# Altium PCB NIXIEClock_151223.PcbDoc (part 2 of 3)
Units mil, origin at the board's own origin, x right, y up, seen from the top; angles counter-clockwise.
Board outline 8470 x 2600 mil, 2 copper layers (Top Layer, Bottom Layer); 115 components, 157 nets, 483 pads, 249 vias.
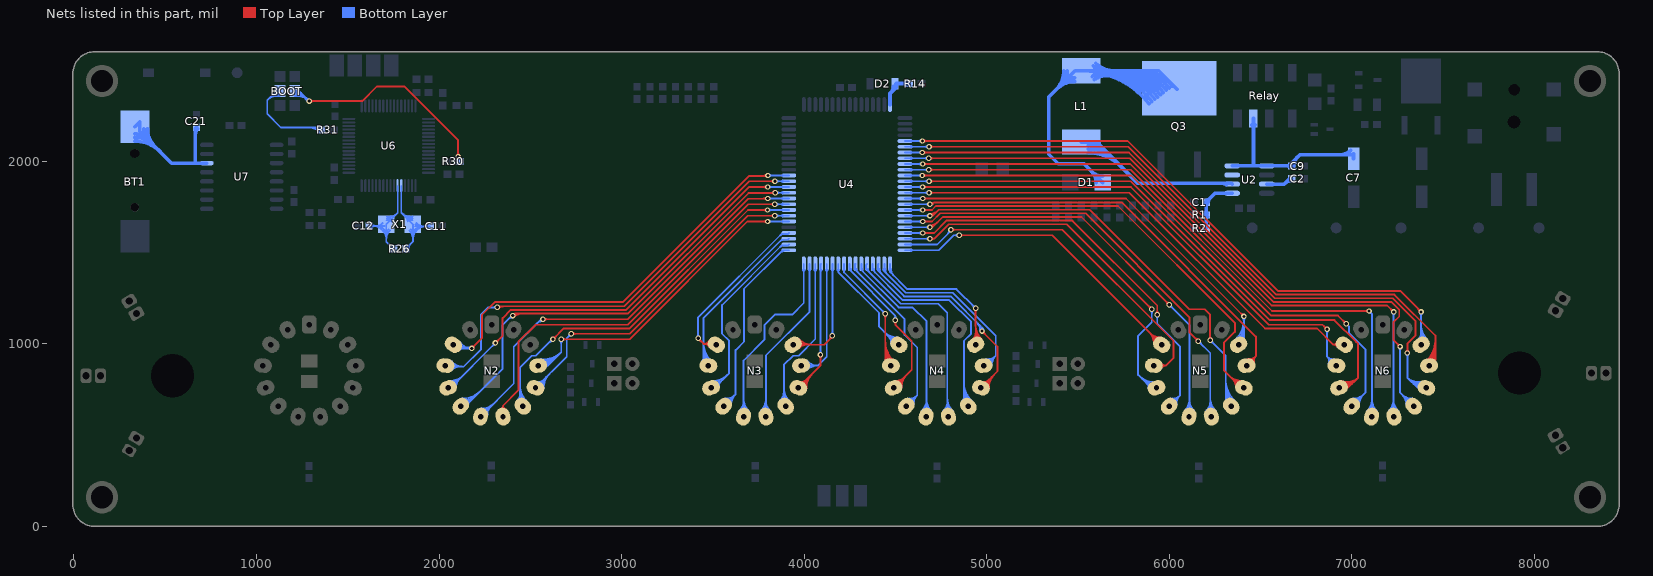
[diagram p2: the nets of this part, all layers, seen from the top]

## Via types
v1: diameter 30, hole 18, Top Layer to Bottom Layer, tented both sides, 204 vias
v2: diameter 40, hole 23, Top Layer to Bottom Layer, tented both sides, 35 vias
v3: diameter 30, hole 15, Top Layer to Bottom Layer, tented both sides, 10 vias

## Nets (pads, with @x,y where several pads share a name; then routed paths per layer and width w, separated by ;. In a path a pad name is that pad's centre, name@x,y a point inside that pad or via, vN(x,y) a via of type N, cw(c..) or ccw(c..) an arc to the next point about the centre after c; other vN are vias at no path point) (continued)
N2_1: N2.3 U4.14 | length 2739.5
  Top Layer w10: v1(2179,975) 2234.63,1030.63 2234.63,1158.06 2306.57,1230 3009,1230 3699,1920 3799,1920 v3(3801.24,1922.24) ; v1@2179,985 ccw(c2179,1009.14) 2196.07,992.07 ccw(c2213.14,975) v1@2189,975 ; 3771.68,1920 ccw(c3771.68,1951.8) v3@3794.17,1929.32 ; 3782.52,1920 cw(c3782.52,1903.52) v3@3794.17,1915.17
  Bottom Layer w10: N2.3@2078.4,995.37 2098.77,975 v1(2179,975) cw(c2179,1052.24) N2.3@2114.98,1009.02 ; N2.3@2098.4,997.82 ccw(c2141.36,1026.83) 2141.36,975 ; N2.3@2106.69,1003.42 ccw(c2160.18,1039.54) 2160.18,975 ; N2.3@2110.8,965.48 cw(c2133.79,942.49) 2133.79,975 ; v1@2170.34,970 ccw(c2149.44,957.93) 2155.68,981.25 ccw(c2161.93,1004.57) v1@2174,983.66 ; v1@2171.93,967.93 ccw(c2154.86,950.86) 2154.86,975 ccw(c2154.86,999.14) v1@2171.93,982.07 ; v3(3801.24,1922.24) U4.14@3916.09,1922.24 ; v3@3808.32,1915.17 cw(c3825.39,1898.1) 3825.39,1922.24 cw(c3825.39,1946.39) v3@3808.32,1929.32 ; U4.14@3882.44,1918.12 ccw(c3872.49,1908.18) 3872.49,1922.24 ccw(c3872.49,1936.31) U4.14@3882.44,1926.36
N2_2: N2.4 U4.13 | length 2835.5
  Top Layer w10: v1(2319,1200) 2324.71,1205.71 3014.71,1205.71 3699.75,1890.75 v1(3839.75,1890.75) ; v1@2326.07,1192.93 cw(c2356.93,1162.07) 2356.93,1205.71 ; v1@3832.68,1883.68 ccw(c3815.61,1866.61) 3815.61,1890.75 ccw(c3815.61,1914.89) v1@3832.68,1897.82
  Bottom Layer w10: N2.4@2034.96,880.85 2040.81,875 2134,875 ; N2.4@2055.28,889.42 ccw(c2088.26,919.92) 2088.26,875 ; N2.4@2061.96,862.43 cw(c2092.31,832.09) 2092.31,875 ; N2.4@2062.62,896.21 ccw(c2111.13,941.06) 2111.13,875 ; N2.4@2069.03,855.36 cw(c2116.45,807.95) 2116.45,875 ; N2.4@2069.97,903 ccw(c2134,962.21) 2134,875 ; v1@2311.93,1192.93 ccw(c2294.86,1175.86) 2294.86,1200 ccw(c2294.86,1224.14) v1@2311.93,1207.07 ; v1(2319,1200) 2269,1200 2230.33,1161.33 2230.33,971.33 2134,875 ; v1(3839.75,1890.75) U4.13@3916.09,1890.75 ; v1@3846.82,1883.68 cw(c3863.89,1866.61) 3863.89,1890.75 cw(c3863.89,1914.89) v1@3846.82,1897.82 ; U4.13@3882.44,1886.63 ccw(c3872.49,1876.68) 3872.49,1890.75 ccw(c3872.49,1904.82) U4.13@3882.44,1894.87
N2_3: N2.5 U4.12 | length 2818.3
  Top Layer w10: v1(2309,1005) 2347.67,1043.67 2347.67,1141.09 2392.28,1185.71 3024.71,1185.71 3699,1860 3799,1860 v3(3799.75,1859.25) ; v1@2309,1015 ccw(c2309,1039.14) 2326.07,1022.07 ccw(c2343.14,1005) v1@2319,1005 ; 3773.8,1860 cw(c3773.8,1833.3) v3@3792.68,1852.18 ; 3777.41,1860 ccw(c3777.41,1881.59) v3@3792.68,1866.32
  Bottom Layer w10: N2.5@2049.72,759.26 2063.26,759.26 v1(2309,1005) ; N2.5@2058.93,777.12 ccw(c2058.93,830.7) 2096.81,792.81 ; N2.5@2058.93,787.12 ccw(c2058.93,864.84) 2113.88,809.88 ; N2.5@2058.93,797.12 ccw(c2058.93,898.99) 2130.96,826.96 ; N2.5@2083.3,762.75 cw(c2123.24,762.75) 2094.99,790.99 ; N2.5@2093.3,762.75 cw(c2157.38,762.75) 2112.07,808.07 ; v1@2299,1005 cw(c2274.86,1005) 2291.93,987.93 cw(c2309,970.86) v1@2309,995 ; v3(3799.75,1859.25) U4.12@3916.09,1859.25 ; v3@3806.82,1852.18 cw(c3823.89,1835.11) 3823.89,1859.25 cw(c3823.89,1883.39) v3@3806.82,1866.32 ; U4.12@3882.44,1855.13 ccw(c3872.49,1845.19) 3872.49,1859.25 ccw(c3872.49,1873.32) U4.12@3882.44,1863.37
N2_4: N2.6 U4.11 | length 2997.7
  Top Layer w10: v1@2407.72,1164.28 ccw(c2410.13,1170.29) 2414.71,1165.71 ; v1@2411.07,1147.93 cw(c2454,1105) 2454,1165.71 ; v1@2413.28,1158.72 cw(c2419.29,1161.13) 2414.71,1165.71 ; 2429.86,1165.71 ccw(c2429.86,1129.14) v1(2404,1155) 2414.71,1165.71 ; 3813.49,1826.26 ccw(c3813.49,1855.51) v1@3834.17,1834.83 ; 3820.71,1826.26 cw(c3820.71,1807.23) v1@3834.17,1820.68 ; v1(3841.24,1827.76) 3839.75,1826.26 3695.26,1826.26 3034.71,1165.71 2414.71,1165.71
  Bottom Layer w10: N2.6@2119.3,658.46 2142.46,658.46 2347.67,863.67 2347.67,1103.67 2399,1155 v1(2404,1155) ; N2.6@2125.83,670.19 ccw(c2125.83,738.68) 2174.25,690.25 ; N2.6@2125.83,680.19 ccw(c2125.83,772.82) 2191.32,707.32 ; N2.6@2125.83,690.19 ccw(c2125.83,806.97) 2208.4,724.4 ; N2.6@2125.83,700.19 ccw(c2125.83,841.11) 2225.47,741.47 ; N2.6@2160.2,665.82 cw(c2185.23,665.82) 2167.53,683.53 ; 2378.39,1134.39 cw(c2404,1108.79) v1@2404,1145 ; 2390.46,1146.46 ccw(c2381.93,1155) v1@2394,1155 ; v1(3841.24,1827.76) U4.11@3916.09,1827.76 ; v1@3848.32,1820.68 cw(c3865.39,1803.61) 3865.39,1827.76 cw(c3865.39,1851.9) v1@3848.32,1834.83 ; U4.11@3882.44,1823.64 ccw(c3872.49,1813.69) 3872.49,1827.76 ccw(c3872.49,1841.82) U4.11@3882.44,1831.88
N2_5: N2.7 U4.10 | length 2759.2
  Top Layer w10: v1(2569,1135) 3034,1135 3694,1795 3799,1795 v1(3800.26,1796.26) ; v1@2576.07,1127.93 cw(c2593.14,1110.86) 2593.14,1135 cw(c2593.14,1159.14) v1@2576.07,1142.07 ; 3773.08,1795 ccw(c3773.08,1823.44) v1@3793.19,1803.33 ; 3779.16,1795 cw(c3779.16,1775.16) v1@3793.19,1789.19
  Bottom Layer w10: N2.7@2227.75,601.53 2409,782.78 2409,985.25 2558.75,1135 v1(2569,1135) ccw(c2569,1110.25) 2551.5,1127.75 ; N2.7@2230.11,625.46 ccw(c2230.11,677.54) 2266.93,640.71 ; N2.7@2230.11,635.46 ccw(c2230.11,711.68) 2284,657.78 ; N2.7@2230.11,645.46 ccw(c2230.11,745.82) 2301.07,674.85 ; N2.7@2254.48,611.09 cw(c2295.93,611.09) 2266.62,640.4 ; N2.7@2264.48,611.09 cw(c2330.07,611.09) 2283.69,657.47 ; 2534.43,1110.68 cw(c2569,1076.11) v1@2569,1125 ; v1(3800.26,1796.26) U4.10@3916.09,1796.26 ; v1@3807.33,1789.19 cw(c3824.4,1772.12) 3824.4,1796.26 cw(c3824.4,1820.4) v1@3807.33,1803.33 ; U4.10@3882.44,1792.14 ccw(c3872.49,1782.19) 3872.49,1796.26 ccw(c3872.49,1810.33) U4.10@3882.44,1800.38
N2_6: N2.8 U4.9 | length 2382.8
  Top Layer w10: N2.8@2337.51,643.85 ccw(c2332,661.23) 2350.23,661.23 ; N2.8@2350.23,601.53 2350.23,661.23 ; N2.8@2362.34,642.26 cw(c2371.14,661.23) 2350.23,661.23 ; v1@3832.17,1757.69 ccw(c3815.09,1740.62) 3815.09,1764.76 ccw(c3815.09,1788.91) v1@3832.17,1771.83 ; v1(3839.24,1764.76) 3693.76,1764.76 3034,1105 2528.75,1105 2434.59,1010.84 2434.59,745.59 2350.23,661.23
  Bottom Layer w10: v1(3839.24,1764.76) U4.9@3916.09,1764.76 ; v1@3846.31,1757.69 cw(c3863.38,1740.62) 3863.38,1764.76 cw(c3863.38,1788.91) v1@3846.31,1771.83 ; U4.9@3882.44,1760.64 ccw(c3872.49,1750.7) 3872.49,1764.76 ccw(c3872.49,1778.83) U4.9@3882.44,1768.88
N2_7: N2.9 U4.8 | length 2493.8
  Top Layer w10: v1(2624,1025) 2684,1085 3044,1085 3692.27,1733.27 v3(3799,1733.27) ; v1@2624,1035 ccw(c2624,1059.14) 2641.07,1042.07 ccw(c2658.14,1025) v1@2634,1025 ; v3@3791.93,1726.2 ccw(c3774.86,1709.13) 3774.86,1733.27 ccw(c3774.86,1757.41) v3@3791.93,1740.34
  Bottom Layer w10: N2.9@2427.86,690.12 ccw(c2388.89,729.08) 2444,729.08 ; N2.9@2434.93,683.04 ccw(c2413.03,704.94) 2444,704.94 ; 2444,720.21 ccw(c2506.56,720.21) N2.9@2462.32,675.97 ; 2444,744.35 ccw(c2530.7,744.35) N2.9@2469.39,683.04 ; 2444,768.49 ccw(c2554.84,768.49) N2.9@2476.46,690.12 ; N2.9@2458.69,658.44 2444,673.13 2444,871.43 2507.57,935 2529,935 2619,1025 v1(2624,1025) ; 2598.39,1004.39 cw(c2624,978.79) v1@2624,1015 ; 2610.46,1016.46 ccw(c2601.93,1025) v1@2614,1025 ; v3(3799,1733.27) U4.8@3916.09,1733.27 ; v3@3806.07,1726.2 cw(c3823.14,1709.13) 3823.14,1733.27 cw(c3823.14,1757.41) v3@3806.07,1740.34 ; U4.8@3882.44,1729.15 ccw(c3872.49,1719.2) 3872.49,1733.27 ccw(c3872.49,1747.33) U4.8@3882.44,1737.39
N2_8: N2.10 U4.7 | length 2262.5
  Top Layer w10: v1(2724,1055) 3044,1055 3690.77,1701.77 v1(3839,1701.77) ; v1@2731.07,1047.93 cw(c2748.14,1030.86) 2748.14,1055 cw(c2748.14,1079.14) v1@2731.07,1062.07 ; v1@3831.93,1694.7 ccw(c3814.86,1677.63) 3814.86,1701.77 ccw(c3814.86,1725.91) v1@3831.93,1708.84
  Bottom Layer w10: N2.10@2528.27,759.24 2699,929.97 2699,1030 v1(2724,1055) ; N2.10@2537.47,790.12 ccw(c2537.47,842.46) 2574.48,805.45 ; N2.10@2551.84,755.75 cw(c2617.18,755.75) 2570.98,801.95 ; N2.10@2561.84,755.75 cw(c2651.32,755.75) 2588.05,819.02 ; N2.10@2571.84,755.75 cw(c2685.46,755.75) 2605.12,836.09 ; v1@2714,1055 cw(c2689.86,1055) 2706.93,1037.93 cw(c2724,1020.86) v1@2724,1045 ; v1(3839,1701.77) U4.7@3916.09,1701.77 ; v1@3846.07,1694.7 cw(c3863.14,1677.63) 3863.14,1701.77 cw(c3863.14,1725.91) v1@3846.07,1708.84 ; U4.7@3882.44,1697.65 ccw(c3872.49,1687.7) 3872.49,1701.77 ccw(c3872.49,1715.84) U4.7@3882.44,1705.89
N2_9: N2.11 U4.6 | length 2431.8
  Top Layer w10: v1(2669,1025) 3044,1025 3689.28,1670.28 v1(3799.28,1670.28) ; v1@2676.07,1017.93 cw(c2693.14,1000.86) 2693.14,1025 cw(c2693.14,1049.14) v1@2676.07,1032.07 ; v1@3792.2,1663.2 ccw(c3775.13,1646.13) 3775.13,1670.28 ccw(c3775.13,1694.42) v1@3792.2,1677.35
  Bottom Layer w10: N2.11@2543.04,880.85 2594.85,880.85 2669,955 ; N2.11@2550.96,866.52 ccw(c2557.44,920.91) 2596.18,882.18 ; N2.11@2552.14,876.45 ccw(c2560.54,946.94) 2610.74,896.74 ; N2.11@2553.33,886.38 ccw(c2563.64,972.96) 2625.3,911.3 ; N2.11@2554.51,896.31 ccw(c2566.75,998.99) 2639.87,925.87 ; N2.11@2555.69,906.24 ccw(c2569.85,1025.02) 2654.43,940.43 ; N2.11@2556.88,916.17 ccw(c2572.95,1051.04) 2669,955 ; v1@2661.93,1017.93 cw(c2644.86,1000.86) 2669,1000.86 cw(c2693.14,1000.86) v1@2676.07,1017.93 ; v1(2669,1025) 2669,955 ; v1(3799.28,1670.28) U4.6@3916.09,1670.28 ; v1@3806.35,1663.2 cw(c3823.42,1646.13) 3823.42,1670.28 cw(c3823.42,1694.42) v1@3806.35,1677.35 ; U4.6@3882.44,1666.16 ccw(c3872.49,1656.21) 3872.49,1670.28 ccw(c3872.49,1684.34) U4.6@3882.44,1674.4
N3_0: N3.12 U4.75 | length 994.8
  Top Layer w10: N3.12@3939.6,995.37 4109.37,995.37 4154,1040 v1(4154,1045) ; N3.12@3957.87,1011.13 ccw(c3995.9,1049.16) 3995.9,995.37 ; N3.12@3964.94,983.73 cw(c3993.04,955.63) 3993.04,995.37 ; N3.12@3964.94,1018.2 ccw(c4020.04,1073.3) 4020.04,995.37 ; N3.12@3972.01,976.66 cw(c4017.18,931.49) 4017.18,995.37 ; N3.12@3972.01,1025.27 ccw(c4044.18,1097.44) 4044.18,995.37 ; 4133.39,1019.39 ccw(c4107.79,1045) v1@4144,1045 ; 4145.46,1031.46 cw(c4154,1022.93) v1@4154,1035
  Bottom Layer w10: v1@4146.93,1052.07 ccw(c4126.82,1072.18) 4155.26,1072.18 ; U4.75@4151.14,1405.33 cw(c4141.19,1395.38) 4155.26,1395.38 cw(c4169.33,1395.38) U4.75@4159.38,1405.33 ; v1@4155.26,1045 U4.75@4155.26,1438.98 ; 4155.26,1066.1 ccw(c4175.1,1066.1) v1@4161.07,1052.07
N3_1: N3.3 U4.4 | length 1144.5
  Top Layer w10: v1@3419,1020 cw(c3419,995.86) 3436.07,1012.93 cw(c3453.14,1030) v1@3429,1030 ; v1(3419,1030) 3449,1000 ; 3466.35,1000 ccw(c3466.35,1026.41) N3.3@3489.21,1013.18 ; 3467.35,1000 cw(c3467.35,973.27) N3.3@3489.81,987.76 ; N3.3@3480.55,1018.19 cw(c3449,1036.46) 3449,1000 ; N3.3@3481.41,982.34 ccw(c3449,961.44) 3449,1000 ; N3.3@3518.4,995.37 3513.77,1000 3449,1000
  Bottom Layer w10: v1@3411.93,1037.07 ccw(c3394.86,1054.14) 3419,1054.14 ccw(c3443.14,1054.14) v1@3426.07,1037.07 ; v1(3419,1030) 3419,1144.75 3875.86,1601.61 3910.42,1601.61 U4.4@3916.09,1607.28 ; 3868.03,1593.78 cw(c3886.56,1575.25) U4.4@3886.56,1601.46
N3_2: N3.4 U4.3 | length 1286.3
  Bottom Layer w10: N3.4@3440.89,906.34 ccw(c3421.3,925.93) 3449,925.93 ; 3449,931.67 ccw(c3514.83,931.67) N3.4@3468.28,885.13 ; 3449,955.82 ccw(c3538.97,955.82) N3.4@3475.35,892.2 ; 3449,979.96 ccw(c3563.11,979.96) N3.4@3482.42,899.27 ; 3449,1004.1 ccw(c3587.25,1004.1) N3.4@3489.49,906.34 ; N3.4@3474.96,880.85 3468.15,880.85 3449,900 3449,1143.26 3875.86,1570.12 3910.42,1570.12 U4.3@3916.09,1575.79 ; 3868.03,1562.28 cw(c3886.56,1543.75) U4.3@3886.56,1569.96
N3_3: N3.5 U4.2 | length 1298.2
  Bottom Layer w10: N3.5@3489.72,759.26 3508.26,759.26 3589,840 3589,1015.86 3549.82,1055.05 3549.82,1212.58 3875.86,1538.62 3910.42,1538.62 U4.2@3916.09,1544.29 ; N3.5@3498.93,777.12 ccw(c3498.93,842.77) 3545.35,796.35 ; N3.5@3498.93,787.12 ccw(c3498.93,876.92) 3562.42,813.42 ; N3.5@3498.93,797.12 ccw(c3498.93,911.06) 3579.49,830.49 ; N3.5@3533.3,762.75 cw(c3585.31,762.75) 3548.53,799.53 ; 3868.03,1530.79 cw(c3886.56,1512.26) U4.2@3886.56,1538.46
N3_4: N3.6 U4.1 | length 1259.5
  Bottom Layer w10: N3.6@3559.3,658.46 3624,723.16 ; N3.6@3566.4,690.19 ccw(c3567.73,746.39) 3607.48,706.64 ; N3.6@3566.64,700.18 ccw(c3568.49,778.67) 3624,723.16 ; N3.6@3590.2,665.82 cw(c3647,665.82) 3606.83,705.99 ; N3.6@3600.2,665.82 cw(c3681.14,665.82) 3623.9,723.06 ; 3868.48,1499.48 cw(c3886.56,1481.4) U4.1@3886.56,1506.97 ; U4.1@3916.09,1512.8 3881.8,1512.8 3670.33,1301.33 3670.33,1012.19 3624,965.86 3624,723.16
N3_5: N3.7 U4.80 | length 1308.2
  Bottom Layer w10: N3.7@3645.8,635.39 ccw(c3592.82,688.38) 3667.75,688.38 ; N3.7@3652.87,628.32 ccw(c3616.96,664.24) 3667.75,664.24 ; N3.7@3667.75,601.53 3667.75,908.75 3783.37,1024.37 3783.37,1104.37 3839,1160 3934,1160 3997.78,1223.78 U4.80@3997.78,1438.98 ; 3667.75,651.47 ccw(c3710.49,651.47) N3.7@3680.27,621.25 ; 3667.75,675.61 ccw(c3734.63,675.61) N3.7@3687.34,628.32 ; 3667.75,699.75 ccw(c3758.77,699.75) N3.7@3694.41,635.39 ; U4.80@3993.66,1405.33 cw(c3983.71,1395.38) 3997.78,1395.38 cw(c4011.85,1395.38) U4.80@4001.9,1405.33
N3_6: N3.8 U4.79 | length 1214.9
  Bottom Layer w10: N3.8@3763.57,635.39 ccw(c3699.21,699.75) 3790.23,699.75 ; N3.8@3770.64,628.32 ccw(c3723.36,675.61) 3790.23,675.61 ; N3.8@3777.72,621.25 ccw(c3747.5,651.46) 3790.23,651.46 ; N3.8@3790.23,601.53 3790.23,936.23 4029.28,1175.28 U4.79@4029.28,1438.98 ; 3790.23,664.23 ccw(c3841.02,664.23) N3.8@3805.11,628.32 ; 3790.23,688.37 ccw(c3865.17,688.37) N3.8@3812.18,635.39 ; U4.79@4025.16,1405.33 cw(c4015.21,1395.38) 4029.28,1395.38 cw(c4043.34,1395.38) U4.79@4033.4,1405.33
N3_7: N3.9 U4.78 | length 1153.8
  Bottom Layer w10: N3.9@3867.86,690.12 ccw(c3816.82,741.16) 3889,741.16 ; N3.9@3874.93,683.04 ccw(c3840.96,717.01) 3889,717.01 ; 3889,708.14 ccw(c3934.49,708.14) N3.9@3902.32,675.97 ; 3889,732.28 ccw(c3958.63,732.28) N3.9@3909.39,683.04 ; 3889,756.42 ccw(c3982.77,756.42) N3.9@3916.46,690.12 ; N3.9@3898.69,658.44 3889,668.13 3889,885 3939,935 3969,935 4060.77,1026.77 U4.78@4060.77,1438.98 ; U4.78@4056.65,1405.33 cw(c4046.7,1395.38) 4060.77,1395.38 cw(c4074.84,1395.38) U4.78@4064.89,1405.33
N3_8: N3.10 U4.77 | length 1078.7
  Top Layer w10: N3.10@3968.27,759.24 4089,879.97 v1(4089,940) ; N3.10@3977.47,790.12 ccw(c3977.47,842.46) 4014.48,805.45 ; N3.10@3991.84,755.75 cw(c4057.18,755.75) 4010.98,801.95 ; N3.10@4001.84,755.75 cw(c4091.32,755.75) 4028.05,819.02 ; N3.10@4011.84,755.75 cw(c4125.46,755.75) 4045.12,836.09 ; v1@4081.93,932.93 cw(c4064.86,915.86) 4089,915.86 cw(c4113.14,915.86) v1@4096.07,932.93
  Bottom Layer w10: v1@4081.93,947.07 ccw(c4064.86,964.14) 4089,964.14 ccw(c4113.14,964.14) v1@4096.07,947.07 ; v1(4089,940) 4089,1435.71 U4.77@4092.27,1438.98 ; 4089,1387.49 cw(c4114.22,1387.49) U4.77@4096.39,1405.33
N3_9: N3.11 U4.76 | length 907.5
  Bottom Layer w10: N3.11@3983.04,880.85 4074.85,880.85 ; N3.11@4010.04,864.8 cw(c4048.78,826.07) 4048.78,880.85 ; N3.11@4010.59,898.7 ccw(c4051.77,937.28) 4051.77,880.85 ; N3.11@4017.11,857.73 cw(c4072.92,801.92) 4072.92,880.85 ; N3.11@4017.89,905.54 ccw(c4074.85,958.9) 4074.85,880.85 ; U4.76@4119.64,1405.33 cw(c4109.7,1395.38) 4123.76,1395.38 cw(c4137.83,1395.38) U4.76@4127.88,1405.33 ; U4.76@4123.76,1438.98 4123.76,1206.33 4124,1206.1 4124,930 4074.85,880.85
N4_0: N4.12 U4.65 | length 1229.7
  Top Layer w10: N4.12@4923.35,1025.22 ccw(c4884.18,1064.23) 4939.47,1064.34 ; N4.12@4930.44,1018.16 ccw(c4908.37,1040.14) 4939.51,1040.2 ; v1@4931.94,1187.91 cw(c4914.42,1170.32) 4939.25,1170.37 ; v1@4939.2,1195 N4.12@4939.6,995.37 ; 4939.25,1171.35 cw(c4962.7,1171.39) v1@4946.09,1187.94 ; 4939.39,1103.51 ccw(c5050.06,1103.73) N4.12@4971.96,1025.32 ; 4939.44,1079.37 ccw(c5025.96,1079.54) N4.12@4964.9,1018.23 ; 4939.48,1055.22 ccw(c5001.87,1055.35) N4.12@4957.85,1011.15
  Bottom Layer w10: U4.65@4466.05,1409.45 ccw(c4493.8,1409.45) 4474.18,1389.82 ; U4.65@4466.1,1405.33 cw(c4456.15,1395.38) 4470.22,1395.38 cw(c4484.29,1395.38) U4.65@4474.34,1405.33 ; U4.65@4470.22,1438.98 4470.22,1393.78 4564,1300 4834,1300 4936.5,1197.5 v1@4936.5,1192.5 ; U4.65@4476.05,1409.45 ccw(c4527.94,1409.45) 4491.25,1372.75 ; v1@4929,1195 ccw(c4904.86,1195) 4921.93,1212.07 ccw(c4939,1229.14) v1@4939,1205
  other v1: 4939,1195
N4_1: N4.3 U4.74 | length 923.3
  Bottom Layer w10: U4.74@4182.64,1405.33 cw(c4172.69,1395.38) 4186.76,1395.38 cw(c4200.82,1395.38) U4.74@4190.88,1405.33 ; U4.74@4186.76,1438.98 4186.76,1392.24 4410,1169 4410,1094 4483.25,1020.75 4514,1020.75 4488.63,995.37 N4.3@4518.4,995.37 ; 4439.23,1064.77 ccw(c4510.3,1135.84) N4.3@4510.3,1035.33 ; 4456.3,1047.7 ccw(c4510.3,1101.7) N4.3@4510.3,1025.33 ; 4456.76,1047.24 cw(c4410.48,1000.96) N4.3@4475.93,1000.96 ; 4473.37,1030.63 ccw(c4510.3,1067.55) N4.3@4510.3,1015.33 ; 4473.83,1030.17 cw(c4444.62,1000.96) N4.3@4485.93,1000.96
N4_2: N4.4 U4.73 | length 1182.7
  Top Layer w10: v1@4436.93,1157.93 cw(c4419.86,1140.86) 4444,1140.86 cw(c4468.14,1140.86) v1@4451.07,1157.93 ; 4444,919.6 ccw(c4502.76,919.6) N4.4@4461.21,878.06 ; 4444,943.74 ccw(c4526.9,943.74) N4.4@4468.28,885.13 ; 4444,967.89 ccw(c4551.04,967.89) N4.4@4475.35,892.2 ; 4444,992.03 ccw(c4575.18,992.03) N4.4@4482.42,899.27 ; 4444,1016.17 ccw(c4599.32,1016.17) N4.4@4489.49,906.34 ; v1(4444,1165) 4444,911.81 N4.4@4474.96,880.85
  Bottom Layer w10: U4.73@4214.13,1405.33 cw(c4204.19,1395.38) 4218.25,1395.38 cw(c4232.32,1395.38) U4.73@4222.37,1405.33 ; U4.73@4218.25,1438.98 4218.25,1390.75 v1(4444,1165) ; v1@4434,1165 ccw(c4409.86,1165) 4426.93,1182.07 ccw(c4444,1199.14) v1@4444,1175
N4_3: N4.5 U4.72 | length 1219.2
  Top Layer w10: N4.5@4489.72,759.26 4589,858.54 4589,1015 4499,1105 v1(4499,1130) ; v1@4491.93,1122.93 cw(c4474.86,1105.86) 4499,1105.86 cw(c4523.14,1105.86) v1@4506.07,1122.93 ; N4.5@4498.93,787.12 ccw(c4498.93,832.16) 4530.77,800.31 ; N4.5@4498.93,797.12 ccw(c4498.93,866.3) 4547.85,817.38 ; N4.5@4513.3,762.75 cw(c4561.78,762.75) 4527.5,797.03 ; N4.5@4523.3,762.75 cw(c4595.92,762.75) 4544.57,814.1 ; N4.5@4533.3,762.75 cw(c4630.06,762.75) 4561.64,831.18
  Bottom Layer w10: U4.72@4249.75,1438.98 4249,1438.23 4249,1405.17 4499,1155.17 v1(4499,1130) ; U4.72@4255.57,1409.45 ccw(c4281.78,1409.45) 4263.25,1390.92 ; v1@4491.93,1137.07 ccw(c4474.86,1154.14) 4499,1154.14 ccw(c4523.14,1154.14) v1@4506.07,1137.07
N4_4: N4.6 U4.71 | length 1155.8
  Bottom Layer w10: U4.71@4281.24,1438.98 4279,1436.73 4279,1406.66 4549.82,1135.85 4549.82,1049.18 4619,980 4619,718.16 ; U4.71@4287.07,1409.45 ccw(c4313.28,1409.45) 4294.75,1390.92 ; N4.6@4559.3,658.46 4619,718.16 ; N4.6@4568.04,690.09 ccw(c4572.13,734.84) 4603.91,703.07 ; N4.6@4568.95,700.05 ccw(c4574.66,762.49) 4619,718.16 ; N4.6@4590.14,667.4 cw(c4635.56,670.35) 4603.38,702.54 ; N4.6@4600.12,668.05 cw(c4664.89,672.26) 4619,718.16
N4_5: N4.7 U4.70 | length 1274.4
  Bottom Layer w10: U4.70@4312.74,1438.98 4314,1437.72 4314,1403.16 4517.16,1200 4593,1200 4670.33,1122.67 4670.33,604.12 N4.7@4667.75,601.53 ; U4.70@4318.57,1409.45 ccw(c4344.77,1409.45) 4326.24,1390.92 ; N4.7@4645.8,635.39 ccw(c4586.58,694.62) 4670.33,694.62 ; N4.7@4652.87,628.32 ccw(c4610.72,670.48) 4670.33,670.48 ; 4670.33,669.37 ccw(c4728.39,669.37) N4.7@4687.34,628.32 ; 4670.33,693.51 ccw(c4752.53,693.51) N4.7@4694.41,635.39
N4_6: N4.8 U4.69 | length 1427.8
  Bottom Layer w10: U4.69@4344.24,1438.98 4339,1433.74 4339,1409.66 4528.66,1220 4734,1220 4784,1170 4784,607.76 N4.8@4790.23,601.53 ; U4.69@4350.06,1409.45 ccw(c4376.27,1409.45) 4357.74,1390.92 ; N4.8@4763.57,635.39 ccw(c4714.26,684.7) 4784,684.7 ; N4.8@4770.64,628.32 ccw(c4738.4,660.56) 4784,660.56 ; 4784,655.14 ccw(c4831.93,655.14) N4.8@4798.04,621.25 ; 4784,679.28 ccw(c4856.07,679.28) N4.8@4805.11,628.32 ; 4784,703.42 ccw(c4880.21,703.42) N4.8@4812.18,635.39
N4_7: N4.9 U4.68 | length 1556.5
  Bottom Layer w10: U4.68@4375.73,1438.98 4374,1437.24 4374,1405.15 4539.15,1240 4794,1240 4914,1120 4914,1055 4874.59,1015.59 4874.59,682.54 N4.9@4898.69,658.44 ; U4.68@4381.56,1409.45 ccw(c4410.19,1409.45) 4389.95,1389.2 ; N4.9@4867.86,690.12 ccw(c4851.61,706.36) 4874.59,706.36 ; 4874.59,718.79 ccw(c4945.14,718.79) N4.9@4895.25,668.9 ; 4874.59,742.93 ccw(c4969.28,742.93) N4.9@4902.32,675.97 ; 4874.59,767.07 ccw(c4993.42,767.07) N4.9@4909.39,683.04 ; 4874.59,791.21 ccw(c5017.56,791.21) N4.9@4916.46,690.12
N4_8: N4.10 U4.67 | length 1591.5
  Top Layer w10: N4.10@4968.27,759.24 5059,849.97 5059,985 v1(4974,1070) ; v1@4974,1060 cw(c4974,1035.86) 4991.07,1052.93 cw(c5008.14,1070) v1@4984,1070 ; N4.10@4977.47,790.12 ccw(c4977.47,842.46) 5014.48,805.45 ; N4.10@4991.84,755.75 cw(c5057.18,755.75) 5010.98,801.95 ; N4.10@5001.84,755.75 cw(c5091.32,755.75) 5028.05,819.02 ; N4.10@5011.84,755.75 cw(c5125.46,755.75) 5045.12,836.09
  Bottom Layer w10: U4.67@4407.23,1438.98 4404,1435.75 4404,1403.43 4547.43,1260 4803,1260 4974,1089 ; U4.67@4413.06,1409.45 ccw(c4449.44,1409.45) 4423.71,1383.72 ; 4943.49,1119.51 cw(c4893.99,1070) v1@4964,1070 ; 4960.56,1102.44 cw(c4928.13,1070) v1(4974,1070) 4974,1089 ; v1@4968.34,1078.24 ccw(c4960.95,1089) 4974,1089 ; 4977.64,1085.36 cw(c4962.27,1070) v1@4984,1070 ; v1@4979.66,1078.24 cw(c4987.05,1089) 4974,1089
N4_9: N4.11 U4.66 | length 1264.7
  Bottom Layer w10: U4.66@4434.55,1409.45 ccw(c4454.55,1409.45) 4440.41,1395.31 ; U4.66@4435.07,1404.91 cw(c4428.49,1396.71) 4439,1396.71 ; U4.66@4438.72,1438.98 4439,1438.7 4439,1396.72 ; U4.66@4442.69,1405.18 ccw(c4450.56,1396.71) 4439,1396.71 ; U4.66@4444.55,1409.45 ccw(c4488.69,1409.45) 4457.48,1378.24 ; N4.11@4983.04,880.85 4994.85,880.85 5049,935 ; N4.11@4995.27,906.28 ccw(c5000.13,954.08) 5034.11,920.11 ; N4.11@4996.29,916.23 ccw(c5002.88,981.11) 5049,935 ; N4.11@5017.18,882.1 cw(c5067.74,882.24) 5031.99,917.99 ; N4.11@5027.18,882.13 cw(c5101.67,882.33) 5049,935 ; 4439,1396.72 4555.72,1280 4814,1280 5049,1045 5049,935
N5_0: N5.12 U4.55 | length 2925
  Top Layer w10: v1(4649,1796.26) 5762.74,1796.26 v1(6409,1150) ; v1@4656.07,1789.19 cw(c4673.14,1772.12) 4673.14,1796.26 cw(c4673.14,1820.4) v1@4656.07,1803.33 ; v1@6399,1150 ccw(c6374.86,1150) 6391.93,1167.07 ccw(c6409,1184.14) v1@6409,1160
  Bottom Layer w10: U4.55@4551.91,1796.26 v1(4649,1796.26) ; U4.55@4585.56,1792.14 cw(c4595.51,1782.19) 4595.51,1796.26 cw(c4595.51,1810.33) U4.55@4585.56,1800.38 ; v1@4641.93,1789.19 ccw(c4624.86,1772.12) 4624.86,1796.26 ccw(c4624.86,1820.4) v1@4641.93,1803.33 ; N5.12@6363.4,1025.27 ccw(c6253.32,1135.35) v1@6409,1135.35 ; N5.12@6370.47,1018.2 ccw(c6277.46,1111.21) 6409,1111.21 ; N5.12@6377.54,1011.13 ccw(c6301.6,1087.07) 6409,1087.07 ; N5.12@6379.6,995.37 6409,1024.77 v1(6409,1150) ; N5.12@6384.61,1004.05 ccw(c6325.74,1062.93) 6409,1062.93 ; N5.12@6391.69,996.98 ccw(c6349.89,1038.78) 6409,1038.78 ; v1@6401.27,1143.65 cw(c6378.85,1125.23) 6407.73,1122.4 ; v1@6401.93,1142.93 cw(c6384.86,1125.86) 6409,1125.86 cw(c6433.14,1125.86) v1@6416.07,1142.93 ; 6408.4,1129.26 cw(c6427.58,1127.39) v1@6415.35,1142.27
N5_1: N5.3 U4.64 | length 2009.6
  Top Layer w10: v1(4849,1595) 5358.77,1595 N5.3@5958.4,995.37 ; v1@4856.07,1587.93 cw(c4873.14,1570.86) 4873.14,1595 cw(c4873.14,1619.14) v1@4856.07,1602.07 ; 5889.85,1063.92 cw(c5826.89,1000.96) N5.3@5915.93,1000.96 ; 5895.9,1057.86 ccw(c5950.3,1112.25) N5.3@5950.3,1035.33 ; 5906.92,1046.85 cw(c5861.03,1000.96) N5.3@5925.93,1000.96 ; 5912.98,1040.79 ccw(c5950.3,1078.11) N5.3@5950.3,1025.33
  Bottom Layer w10: U4.64@4551.91,1512.8 4736.8,1512.8 4819,1595 v1(4849,1595) ; U4.64@4585.56,1508.68 cw(c4595.51,1498.73) 4595.51,1512.8 cw(c4595.51,1526.86) U4.64@4585.56,1516.92 ; v1@4841.93,1587.93 ccw(c4824.86,1570.86) 4824.86,1595 ccw(c4824.86,1619.14) v1@4841.93,1602.07
N5_2: N5.4 U4.63 | length 2158.6
  Top Layer w10: v1(4804,1625) 5414,1625 6023.41,1015.59 6023.41,925.59 6024,925 5979.85,880.85 ; v1@4811.07,1617.93 cw(c4828.14,1600.86) 4828.14,1625 cw(c4828.14,1649.14) v1@4811.07,1632.07 ; N5.4@5914.96,880.85 5979.85,880.85 ; N5.4@5946.93,869.62 cw(c5964.35,861.74) 5964.35,880.85 ; N5.4@5955.11,895.75 ccw(c5979.85,908.85) 5979.85,880.85 ; N5.4@5956.04,865.49 cw(c5979.85,854.72) 5979.85,880.85
  Bottom Layer w10: U4.63@4551.91,1544.29 4728.29,1544.29 4804,1620 v1(4804,1625) ; U4.63@4585.56,1540.17 cw(c4595.51,1530.22) 4595.51,1544.29 cw(c4595.51,1558.36) U4.63@4585.56,1548.41 ; 4783.39,1599.39 ccw(c4757.79,1625) v1@4794,1625 ; 4795.46,1611.46 cw(c4804,1602.93) v1@4804,1615
N5_3: N5.5 U4.62 | length 2580.9
  Top Layer w10: v1(4689,1575.79) 4712.36,1575.79 ; v1@4696.24,1568.88 cw(c4712.36,1553.5) 4712.36,1575.79 ; v1@4696.24,1582.69 ccw(c4712.36,1598.07) 4712.36,1575.79 ; v1@5894,1190 ccw(c5869.86,1190) 5886.93,1207.07 ccw(c5904,1224.14) v1@5904,1200 ; v1(5904,1190) 5439,1655 4791.57,1655 4712.36,1575.79
  Bottom Layer w10: U4.62@4551.91,1575.79 v1(4689,1575.79) ; U4.62@4585.56,1571.67 cw(c4595.51,1561.72) 4595.51,1575.79 cw(c4595.51,1589.85) U4.62@4585.56,1579.91 ; v1@4681.93,1568.72 ccw(c4664.86,1551.65) 4664.86,1575.79 ccw(c4664.86,1599.93) v1@4681.93,1582.86 ; 5832.33,826.67 ccw(c5920.52,914.86) N5.5@5920.52,790.14 ; 5849.4,809.6 ccw(c5920.52,880.71) N5.5@5920.52,780.14 ; 5866.47,792.53 ccw(c5920.52,846.57) N5.5@5920.52,770.14 ; 5874.07,784.93 cw(c5844.91,755.77) N5.5@5886.15,755.77 ; 5883.54,775.46 ccw(c5920.52,812.43) N5.5@5920.52,760.14 ; v1@5896.93,1182.93 cw(c5879.86,1165.86) 5904,1165.86 cw(c5928.14,1165.86) v1@5911.07,1182.93 ; v1(5904,1190) 5904,1118.7 5829,1043.7 5829,830 5899.74,759.26 N5.5@5929.72,759.26
N5_4: N5.6 U4.61 | length 2592.8
  Top Layer w10: v1(4649,1607.28) 4711.28,1607.28 4779,1675 5469,1675 5934,1210 v1(5934,1160) ; v1@4656.07,1600.21 cw(c4673.14,1583.14) 4673.14,1607.28 cw(c4673.14,1631.43) v1@4656.07,1614.35 ; v1@5926.93,1167.07 ccw(c5909.86,1184.14) 5934,1184.14 ccw(c5958.14,1184.14) v1@5941.07,1167.07
  Bottom Layer w10: U4.61@4551.91,1607.28 v1(4649,1607.28) ; U4.61@4585.56,1603.16 cw(c4595.51,1593.22) 4595.51,1607.28 cw(c4595.51,1621.35) U4.61@4585.56,1611.4 ; v1@4641.93,1600.21 ccw(c4624.86,1583.14) 4624.86,1607.28 ccw(c4624.86,1631.43) v1@4641.93,1614.35 ; v1@5926.93,1152.93 cw(c5909.86,1135.86) 5934,1135.86 cw(c5958.14,1135.86) v1@5941.07,1152.93 ; v1(5934,1160) 5934,1110 6059,985 6059,718.16 ; N5.6@5999.3,658.46 6059,718.16 ; N5.6@6008.04,690.09 ccw(c6012.13,734.84) 6043.91,703.07 ; N5.6@6008.95,700.05 ccw(c6014.66,762.49) 6059,718.16 ; N5.6@6030.14,667.4 cw(c6075.56,670.35) 6043.38,702.54 ; N5.6@6040.12,668.05 cw(c6104.89,672.26) 6059,718.16
N5_5: N5.7 U4.60 | length 2759.7
  Top Layer w10: v1@4689,1648.78 ccw(c4689,1706.19) 4729.59,1665.59 ; 4712.52,1648.52 cw(c4689,1672.05) v1(4689,1638.78) 4702.78,1638.78 4759,1695 5519,1695 v1(5999,1215) ; v1@5989,1215 ccw(c5964.86,1215) 5981.93,1232.07 ccw(c5999,1249.14) v1@5999,1225
  Bottom Layer w10: U4.60@4551.91,1638.78 v1(4689,1638.78) ; U4.60@4585.56,1634.66 cw(c4595.51,1624.71) 4595.51,1638.78 cw(c4595.51,1652.85) U4.60@4585.56,1642.9 ; v1@4681.93,1631.71 ccw(c4664.86,1614.64) 4664.86,1638.78 ccw(c4664.86,1662.92) v1@4681.93,1645.85 ; v1@5999,1205 cw(c5999,1180.86) 6016.07,1197.93 cw(c6033.14,1215) v1@6009,1215 ; v1(5999,1215) 6110.33,1103.67 6110.33,604.12 N5.7@6107.75,601.53 ; N5.7@6085.8,635.39 ccw(c6026.58,694.62) 6110.33,694.62 ; N5.7@6092.87,628.32 ccw(c6050.72,670.48) 6110.33,670.48 ; 6110.33,669.37 ccw(c6168.39,669.37) N5.7@6127.34,628.32 ; 6110.33,693.51 ccw(c6192.53,693.51) N5.7@6134.41,635.39
N5_6: N5.8 U4.59 | length 2841
  Top Layer w10: v1(4649,1670.28) 4699.93,1670.28 4744.65,1715 5541.43,1715 6110.33,1146.09 6110.33,1063.67 v1(6159,1015) ; v1@4656.07,1663.2 cw(c4673.14,1646.13) 4673.14,1670.28 cw(c4673.14,1694.42) v1@4656.07,1677.35 ; v1@6149,1015 ccw(c6124.86,1015) 6141.93,1032.07 ccw(c6159,1049.14) v1@6159,1025
  Bottom Layer w10: U4.59@4551.91,1670.28 v1(4649,1670.28) ; U4.59@4585.56,1666.16 cw(c4595.51,1656.21) 4595.51,1670.28 cw(c4595.51,1684.34) U4.59@4585.56,1674.4 ; v1@4641.93,1663.2 ccw(c4624.86,1646.13) 4624.86,1670.28 ccw(c4624.86,1694.42) v1@4641.93,1677.35 ; v1@6159,1005 cw(c6159,980.86) 6176.07,997.93 cw(c6193.14,1015) v1@6169,1015 ; v1(6159,1015) 6224,950 6224,607.76 N5.8@6230.23,601.53 ; N5.8@6203.57,635.39 ccw(c6154.26,684.7) 6224,684.7 ; N5.8@6210.64,628.32 ccw(c6178.4,660.56) 6224,660.56 ; 6224,655.14 ccw(c6271.93,655.14) N5.8@6238.04,621.25 ; 6224,679.28 ccw(c6296.07,679.28) N5.8@6245.11,628.32 ; 6224,703.42 ccw(c6320.21,703.42) N5.8@6252.18,635.39
N5_7: N5.9 U4.58 | length 3128.3
  Top Layer w10: v3@4689,1711.77 ccw(c4689,1770.06) 4730.21,1728.84 ; 4713.14,1711.77 cw(c4689,1735.91) v3(4689,1701.77) 4703.14,1701.77 4736.37,1735 5564,1735 6109,1190 6194,1190 6223.37,1160.63 6223.37,1020.63 v1(6224,1020) ; v1@6216.93,1027.07 ccw(c6201.38,1042.62) 6223.37,1042.62 ; 6223.37,1045.66 ccw(c6249.66,1045.66) v1@6231.07,1027.07
  Bottom Layer w10: U4.58@4551.91,1701.77 v3(4689,1701.77) ; U4.58@4585.56,1697.65 cw(c4595.51,1687.7) 4595.51,1701.77 cw(c4595.51,1715.84) U4.58@4585.56,1705.89 ; v3@4681.93,1694.7 ccw(c4664.86,1677.63) 4664.86,1701.77 ccw(c4664.86,1725.91) v3@4681.93,1708.84 ; v1@6224,1010 cw(c6224,985.86) 6241.07,1002.93 cw(c6258.14,1020) v1@6234,1020 ; v1(6224,1020) 6309,935 6309,688.13 N5.9@6338.69,658.44 ; 6309,708.14 ccw(c6374.49,708.14) N5.9@6328.18,661.83 ; 6309,732.28 ccw(c6398.63,732.28) N5.9@6335.25,668.9 ; 6309,756.42 ccw(c6422.77,756.42) N5.9@6342.32,675.97 ; 6309,780.56 ccw(c6446.91,780.56) N5.9@6349.39,683.04 ; 6309,804.71 ccw(c6471.06,804.71) N5.9@6356.46,690.12
N5_8: N5.10 U4.57 | length 2877.7
  Top Layer w10: v3(4649,1733.27) 4699.93,1733.27 4721.66,1755 5719,1755 6359,1115 6359,1065.86 6299,1005.86 6299,855 6394.76,759.24 N5.10@6408.27,759.24 ; v3@4656.07,1726.2 cw(c4673.14,1709.13) 4673.14,1733.27 cw(c4673.14,1757.41) v3@4656.07,1740.34 ; 6327.08,826.92 ccw(c6399.07,898.91) N5.10@6399.07,797.1 ; 6344.15,809.85 ccw(c6399.07,864.77) N5.10@6399.07,787.1 ; 6345.91,808.09 cw(c6300.56,762.73) N5.10@6364.7,762.73 ; 6361.22,792.78 ccw(c6399.07,830.63) N5.10@6399.07,777.1 ; 6362.98,791.02 cw(c6334.7,762.73) N5.10@6374.7,762.73
  Bottom Layer w10: U4.57@4551.91,1733.27 v3(4649,1733.27) ; U4.57@4585.56,1729.15 cw(c4595.51,1719.2) 4595.51,1733.27 cw(c4595.51,1747.33) U4.57@4585.56,1737.39 ; v3@4641.93,1726.2 ccw(c4624.86,1709.13) 4624.86,1733.27 ccw(c4624.86,1757.41) v3@4641.93,1740.34
N5_9: N5.11 U4.56 | length 2653.6
  Top Layer w10: v1@4694.52,1773.1 ccw(c4702.79,1785.59) 4713.38,1775 ; 4704.72,1766.35 cw(c4695.89,1775.18) v1(4689,1764.76) 4703.14,1764.76 4713.38,1775 ; N5.11@6423.04,880.85 6474,931.81 ; N5.11@6433.87,906.38 ccw(c6435.27,938.4) 6457.93,915.74 ; N5.11@6434.31,916.37 ccw(c6436.61,969.19) 6474,931.81 ; N5.11@6455.81,890.1 cw(c6483.51,899.81) 6462.75,920.56 ; N5.11@6465.24,893.41 cw(c6500.16,905.65) 6474,931.81 ; 4713.38,1775 5739,1775 6474,1040 6474,931.81
  Bottom Layer w10: U4.56@4551.91,1764.76 v1(4689,1764.76) ; U4.56@4585.56,1760.64 cw(c4595.51,1750.7) 4595.51,1764.76 cw(c4595.51,1778.83) U4.56@4585.56,1768.88 ; v1@4681.93,1757.69 ccw(c4664.86,1740.62) 4664.86,1764.76 ccw(c4664.86,1788.91) v1@4681.93,1771.83
N6_0: N6.12 U4.45 | length 3819
  Top Layer w10: v1(4647.78,2111.22) 5772.48,2111.22 6593.71,1290 7264,1290 v1(7379,1175) ; v1@4654.85,2104.15 cw(c4671.92,2087.08) 4671.92,2111.22 cw(c4671.92,2135.36) v1@4654.85,2118.29 ; v1@7369,1175 ccw(c7344.86,1175) 7361.93,1192.07 ccw(c7379,1209.14) v1@7379,1185
  Bottom Layer w10: U4.45@4551.91,2111.22 v1(4647.78,2111.22) ; U4.45@4585.56,2107.1 cw(c4595.51,2097.15) 4595.51,2111.22 cw(c4595.51,2125.29) U4.45@4585.56,2115.34 ; v1@4640.71,2104.15 ccw(c4623.64,2087.08) 4623.64,2111.22 ccw(c4623.64,2135.36) v1@4640.71,2118.29 ; N6.12@7363.4,1025.27 ccw(c7325.74,1062.93) 7379,1062.93 ; v1@7371.93,1167.93 cw(c7354.86,1150.86) 7379,1150.86 cw(c7403.14,1150.86) v1@7386.07,1167.93 ; 7379,1056.67 ccw(c7443.41,1056.67) N6.12@7397.87,1011.13 ; 7379,1080.81 ccw(c7467.55,1080.81) N6.12@7404.94,1018.2 ; 7379,1104.96 ccw(c7491.7,1104.96) N6.12@7412.01,1025.27 ; v1(7379,1175) 7379,995.98 N6.12@7379.6,995.37
N6_1: N6.3 U4.54 | length 2901.1
  Top Layer w10: v1(4684,1827.76) 5781.24,1827.76 6524,1085 6809,1085 6898.63,995.37 ; v1@4691.07,1820.68 cw(c4708.14,1803.61) 4708.14,1827.76 cw(c4708.14,1851.9) v1@4691.07,1834.83 ; N6.3@6917.03,1009.6 cw(c6898.63,1014.38) 6898.63,995.37 ; N6.3@6921.07,982.87 ccw(c6898.63,968.98) 6898.63,995.37 ; N6.3@6958.4,995.37 6898.63,995.37
  Bottom Layer w10: U4.54@4551.91,1827.76 v1(4684,1827.76) ; U4.54@4585.56,1823.64 cw(c4595.51,1813.69) 4595.51,1827.76 cw(c4595.51,1841.82) U4.54@4585.56,1831.88 ; v1@4676.93,1820.68 ccw(c4659.86,1803.61) 4659.86,1827.76 ccw(c4659.86,1851.9) v1@4676.93,1834.83
N6_2: N6.4 U4.53 | length 3169
  Top Layer w10: v3(4648.25,1859.25) 5789.75,1859.25 6544,1105 6839,1105 v1(6864,1080) ; v3@4655.32,1852.18 cw(c4672.39,1835.11) 4672.39,1859.25 cw(c4672.39,1883.39) v3@4655.32,1866.32 ; v1@6854,1080 ccw(c6829.86,1080) 6846.93,1097.07 ccw(c6864,1114.14) v1@6864,1090
  Bottom Layer w10: U4.53@4551.91,1859.25 v3(4648.25,1859.25) ; U4.53@4585.56,1855.13 cw(c4595.51,1845.19) 4595.51,1859.25 cw(c4595.51,1873.32) U4.53@4585.56,1863.37 ; v3@4641.18,1852.18 ccw(c4624.11,1835.11) 4624.11,1859.25 ccw(c4624.11,1883.39) v3@4641.18,1866.32 ; v1@6856.93,1072.93 cw(c6839.86,1055.86) 6864,1055.86 cw(c6888.14,1055.86) v1@6871.07,1072.93 ; v1(6864,1080) 6864,930 ; N6.4@6872.63,893.05 ccw(c6838.58,904.58) 6864,930 ; 6875.38,918.62 cw(c6855.59,898.82) N6.4@6882.11,889.85 ; 6879.07,914.93 ccw(c6900.2,936.06) N6.4@6902.95,906.3 ; N6.4@6902.03,916.26 cw(c6897.65,963.65) 6864,930 ; N6.4@6914.96,880.85 6913.15,880.85 6864,930
N6_3: N6.5 U4.52 | length 3627.6
  Top Layer w10: v1(4684,1890.75) 5788.25,1890.75 6549,1130 6904.25,1130 7023.41,1010.84 7023.41,1010.59 7034,1000 7034,815 ; v1@4691.07,1883.68 cw(c4708.14,1866.61) 4708.14,1890.75 cw(c4708.14,1914.89) v1@4691.07,1897.82 ; N6.5@6929.72,759.26 6978.26,759.26 7034,815 ; N6.5@6937.12,757.42 ccw(c6953.1,804.75) 6988.42,769.42 ; N6.5@6940.32,766.89 ccw(c6958.85,821.78) 6999.82,780.82 ; N6.5@6943.52,776.37 ccw(c6964.6,838.82) 7011.21,792.21 ; N6.5@6946.72,785.84 ccw(c6970.35,855.86) 7022.6,803.6 ; N6.5@6949.92,795.32 ccw(c6976.1,872.89) 7034,815
  Bottom Layer w10: U4.52@4551.91,1890.75 v1(4684,1890.75) ; U4.52@4585.56,1886.63 cw(c4595.51,1876.68) 4595.51,1890.75 cw(c4595.51,1904.82) U4.52@4585.56,1894.87 ; v1@4676.93,1883.68 ccw(c4659.86,1866.61) 4659.86,1890.75 ccw(c4659.86,1914.89) v1@4676.93,1897.82
N6_4: N6.6 U4.51 | length 3638.1
  Top Layer w10: v3(4646.76,1922.24) 5791.76,1922.24 6559,1155 6924,1155 v1(6969,1110) ; v3@4653.83,1915.17 cw(c4670.9,1898.1) 4670.9,1922.24 cw(c4670.9,1946.39) v3@4653.83,1929.32 ; v1@6959,1110 ccw(c6934.86,1110) 6951.93,1127.07 ccw(c6969,1144.14) v1@6969,1120
  Bottom Layer w10: U4.51@4551.91,1922.24 v3(4646.76,1922.24) ; U4.51@4585.56,1918.12 cw(c4595.51,1908.18) 4595.51,1922.24 cw(c4595.51,1936.31) U4.51@4585.56,1926.36 ; v3@4639.68,1915.17 ccw(c4622.61,1898.1) 4622.61,1922.24 ccw(c4622.61,1946.39) v3@4639.68,1929.32 ; v1(6969,1110) 6984,1095 6984,1060 7074,970 7074,733.16 N6.6@6999.3,658.46 ; N6.6@7005.83,690.19 ccw(c7005.83,751.06) 7048.86,708.02 ; N6.6@7005.83,700.19 ccw(c7005.83,785.2) 7065.93,725.09 ; N6.6@7030.2,665.82 cw(c7087,665.82) 7046.83,705.99 ; N6.6@7040.2,665.82 cw(c7121.14,665.82) 7063.9,723.06
N6_5: N6.7 U4.50 | length 3842.9
  Top Layer w10: v1(4682.74,1953.74) 5788.54,1953.74 6562.28,1180 v1(7094,1180) ; v1@4689.81,1946.67 cw(c4706.88,1929.6) 4706.88,1953.74 cw(c4706.88,1977.88) v1@4689.81,1960.81 ; v1@7086.93,1172.93 ccw(c7069.86,1155.86) 7069.86,1180 ccw(c7069.86,1204.14) v1@7086.93,1187.07
  Bottom Layer w10: U4.50@4551.91,1953.74 v1(4682.74,1953.74) ; U4.50@4585.56,1949.62 cw(c4595.51,1939.67) 4595.51,1953.74 cw(c4595.51,1967.81) U4.50@4585.56,1957.86 ; v1@4675.67,1946.67 ccw(c4658.6,1929.6) 4658.6,1953.74 ccw(c4658.6,1977.88) v1@4675.67,1960.81 ; N6.7@7085.8,635.39 ccw(c7026.58,694.62) 7110.33,694.62 ; N6.7@7092.87,628.32 ccw(c7050.72,670.48) 7110.33,670.48 ; v1(7094,1180) 7110.33,1163.67 ; v1@7094.32,1170 cw(c7095.01,1148.34) 7110.33,1163.67 ; v1@7104,1179.68 ccw(c7125.66,1178.99) 7110.33,1163.67 ; N6.7@7107.75,601.53 7110.33,604.12 7110.33,1163.67 ; 7110.33,669.37 ccw(c7168.39,669.37) N6.7@7127.34,628.32 ; 7110.33,693.51 ccw(c7192.53,693.51) N6.7@7134.41,635.39
N6_6: N6.8 U4.49 | length 3984.3
  Top Layer w10: v3(4648.76,1985.24) 5785.33,1985.24 6560.57,1210 7194,1210 v1(7229,1175) ; v3@4655.83,1978.17 cw(c4672.91,1961.09) 4672.91,1985.24 cw(c4672.91,2009.38) v3@4655.83,1992.31 ; v1@7219,1175 ccw(c7194.86,1175) 7211.93,1192.07 ccw(c7229,1209.14) v1@7229,1185
  Bottom Layer w10: U4.49@4551.91,1985.24 v3(4648.76,1985.24) ; U4.49@4585.56,1981.12 cw(c4595.51,1971.17) 4595.51,1985.24 cw(c4595.51,1999.3) U4.49@4585.56,1989.36 ; v3@4641.69,1978.17 ccw(c4624.62,1961.09) 4624.62,1985.24 ccw(c4624.62,2009.38) v3@4641.69,1992.31 ; N6.8@7203.57,635.39 ccw(c7145.41,693.55) 7227.67,693.55 ; N6.8@7210.64,628.32 ccw(c7169.55,669.41) 7227.67,669.41 ; v1@7221.93,1167.93 cw(c7208.08,1154.08) 7227.67,1154.08 ; 7227.67,670.43 ccw(c7287.22,670.43) N6.8@7245.11,628.32 ; 7227.67,694.57 ccw(c7311.36,694.57) N6.8@7252.18,635.39 ; 7227.67,1147.64 cw(c7256.36,1147.64) v1@7236.07,1167.93 ; v1(7229,1175) 7227.67,1173.67 7227.67,604.1 N6.8@7230.23,601.53
N6_7: N6.9 U4.48 | length 4035.1
  Top Layer w10: v1(4682.27,2016.73) 5782.12,2016.73 6568.85,1230 7216.43,1230 7259,1187.43 7259,1150 7227.67,1118.67 7227.67,1021.33 v1(7264,985) ; v1@4689.34,2009.66 cw(c4706.41,1992.59) 4706.41,2016.73 cw(c4706.41,2040.87) v1@4689.34,2023.8 ; v1@7254,985 ccw(c7229.86,985) 7246.93,1002.07 ccw(c7264,1019.14) v1@7264,995
  Bottom Layer w10: U4.48@4551.91,2016.73 v1(4682.27,2016.73) ; U4.48@4585.56,2012.61 cw(c4595.51,2002.67) 4595.51,2016.73 cw(c4595.51,2030.8) U4.48@4585.56,2020.85 ; v1@4675.2,2009.66 ccw(c4658.13,1992.59) 4658.13,2016.73 ccw(c4658.13,2040.87) v1@4675.2,2023.8 ; v1@7256.93,977.93 cw(c7239.86,960.86) 7264,960.86 cw(c7288.14,960.86) v1@7271.07,977.93 ; v1(7264,985) 7264,733.13 N6.9@7338.69,658.44 ; 7272.05,725.08 ccw(c7332.16,785.19) N6.9@7332.16,700.18 ; 7274.08,723.05 cw(c7216.84,665.81) N6.9@7297.79,665.81 ; 7289.13,708.01 ccw(c7332.16,751.04) N6.9@7332.16,690.18 ; 7291.15,705.98 cw(c7250.98,665.81) N6.9@7307.79,665.81
N6_8: N6.10 U4.47 | length 4175.1
  Top Layer w10: v1(4647.23,2048.23) 5778.91,2048.23 6577.14,1250 7224.71,1250 7348.18,1126.53 7348.18,1044.43 7304,1000.25 v1(7304,950) ; v1@4654.3,2041.16 cw(c4671.37,2024.09) 4671.37,2048.23 cw(c4671.37,2072.37) v1@4654.3,2055.3 ; v1@7296.93,957.07 ccw(c7279.86,974.14) 7304,974.14 ccw(c7328.14,974.14) v1@7311.07,957.07
  Bottom Layer w10: U4.47@4551.91,2048.23 v1(4647.23,2048.23) ; U4.47@4585.56,2044.11 cw(c4595.51,2034.16) 4595.51,2048.23 cw(c4595.51,2062.3) U4.47@4585.56,2052.35 ; v1@4640.16,2041.16 ccw(c4623.09,2024.09) 4623.09,2048.23 ccw(c4623.09,2072.37) v1@4640.16,2055.3 ; v1@7296.93,942.93 cw(c7279.86,925.86) 7304,925.86 cw(c7328.14,925.86) v1@7311.07,942.93 ; v1(7304,950) 7304,815 ; 7315.4,803.6 ccw(c7367.66,855.86) N6.10@7391.28,785.83 ; 7326.8,792.2 ccw(c7373.41,838.82) N6.10@7394.48,776.35 ; 7338.19,780.81 ccw(c7379.16,821.77) N6.10@7397.67,766.87 ; 7349.59,769.41 ccw(c7384.91,804.73) N6.10@7400.87,757.4 ; N6.10@7388.09,795.3 cw(c7361.92,872.91) 7304,815 ; N6.10@7408.27,759.24 7359.76,759.24 7304,815
N6_9: N6.11 U4.46 | length 4109
  Top Layer w10: v1(4683.72,2079.72) 5775.7,2079.72 6585.42,1270 7232.99,1270 7457.99,1045 7457.99,915.81 ; v1@4690.8,2072.65 cw(c4707.87,2055.58) 4707.87,2079.72 cw(c4707.87,2103.87) v1@4690.8,2086.8 ; N6.11@7408.51,906.34 ccw(c7289.03,1025.82) 7457.99,1025.82 ; N6.11@7415.58,899.27 ccw(c7313.17,1001.67) 7457.99,1001.67 ; N6.11@7422.65,892.2 ccw(c7337.32,977.53) 7457.99,977.53 ; N6.11@7423.04,880.85 7457.99,915.81 ; N6.11@7429.72,885.13 ccw(c7361.46,953.39) 7457.99,953.39 ; N6.11@7436.79,878.06 ccw(c7385.6,929.25) 7457.99,929.25 ; N6.11@7446.43,913.59 ccw(c7450.58,923.22) 7457.99,915.8 ; N6.11@7457.84,905.59 cw(c7463.18,910.62) 7457.99,915.8
  Bottom Layer w10: U4.46@4551.91,2079.72 v1(4683.72,2079.72) ; U4.46@4585.56,2075.6 cw(c4595.51,2065.66) 4595.51,2079.72 cw(c4595.51,2093.79) U4.46@4585.56,2083.84 ; v1@4676.65,2072.65 ccw(c4659.58,2055.58) 4659.58,2079.72 ccw(c4659.58,2103.87) v1@4676.65,2086.8
NetBOOT_3: BOOT.3 R30.1 | length 1629.3
  Top Layer w10: v1(1289,2330) 1580,2330 1660,2410 1809,2410 2104,2115 v1(2104,2025) ; v1@1296.07,2322.93 cw(c1313.14,2305.86) 1313.14,2330 cw(c1313.14,2354.14) v1@1296.07,2337.07 ; v1@2096.93,2032.07 ccw(c2079.86,2049.14) 2104,2049.14 ccw(c2128.14,2049.14) v1@2111.07,2032.07
  Bottom Layer w10: BOOT.3@1208.45,2387.47 cw(c1212.92,2343.32) 1244.3,2374.7 ; BOOT.3@1209,2385 1234,2385 v1(1289,2330) ccw(c1221.14,2262.14) BOOT.3@1211.47,2357.62 ; BOOT.3@1209.46,2377.52 cw(c1215.66,2316.26) 1259.2,2359.8 ; BOOT.3@1210.46,2367.57 cw(c1218.4,2289.2) 1274.1,2344.9 ; v1@1279,2330 ccw(c1254.86,2330) 1271.93,2347.07 ccw(c1289,2364.14) v1@1289,2340 ; v1@1279.34,2327.43 ccw(c1256,2321.22) 1268.11,2342.11 ccw(c1280.22,2362.99) v1@1286.43,2339.66 ; R30.1@2098.91,2016.39 cw(c2093.63,2007.47) R30.1@2104,2007.47 ; R30.1@2100.11,2009.38 ccw(c2090.73,2018.77) v1@2104,2018.77 ; R30.1@2109.09,2016.39 ccw(c2114.37,2007.47) R30.1@2104,2007.47 ; R30.1@2113.46,2013.38 cw(c2115.86,2025) v1(2104,2025) R30.1@2104,2007.46
NetBOOT_4: BOOT.4 R31.2 | length 818.2
  Bottom Layer w10: 1073.35,2349.35 cw(c1118.77,2303.93) BOOT.4@1127.11,2367.62 ; 1087.7,2363.7 cw(c1122.1,2329.31) BOOT.4@1128.41,2377.54 ; BOOT.4@1125.82,2357.71 ccw(c1115.45,2278.56) 1059,2335 ; BOOT.4@1129,2385 1109,2385 1059,2335 ; 1287.73,2185 cw(c1287.73,2105.16) R31.2@1344.18,2161.62 ; 1311.87,2185 cw(c1311.87,2129.3) R31.2@1351.25,2168.69 ; R31.2@1336.01,2185 cw(c1336.01,2153.45) R31.2@1358.33,2175.76 ; R31.2@1355.54,2164 1355.54,2178.46 1349,2185 1134,2185 1059,2260 1059,2335
NetBT1_1: BT1.1 C21.2 U7.14 | length 1283.2
  Bottom Layer w20: BT1.1@334,2110.42 cw(c334,1915.87) 471.56,2053.44 ; BT1.1@334,2130.42 cw(c334,1984.16) 437.42,2087.58 ; BT1.1@334,2150.42 cw(c334,2052.44) BT1.1@403.28,2121.72 ; BT1.1@334,2189 360,2215 360,2165 535,1990 U7.14@728.06,1990 ; BT1.1@382.74,2179.16 ccw(c471.82,2179.16) BT1.1@408.83,2116.17 ; BT1.1@402.74,2179.16 ccw(c540.1,2179.16) 442.97,2082.03 ; 665,1990 665,2180.54 C21.2@671,2186.54 ; 665,2146.7 cw(c708.87,2146.7) C21.2@677.85,2177.72
NetC1_1: C1.1 R1.1 R2.2 U2.5 | length 502.7
  Bottom Layer w20: R2.2@6194.62,1639.85 ccw(c6178.08,1656.38) 6201.46,1656.38 ccw(c6224.85,1656.38) R2.2@6208.31,1639.85 ; R1.1@6194.62,1699.15 cw(c6178.08,1682.62) 6201.46,1682.62 cw(c6224.85,1682.62) R1.1@6208.31,1699.15 ; R1.1@6194.62,1712.85 ccw(c6178.08,1729.38) 6201.46,1729.38 ccw(c6224.85,1729.38) R1.1@6208.31,1712.85 ; C1.1@6194.62,1769.15 cw(c6178.08,1752.62) 6201.46,1752.62 cw(c6224.85,1752.62) C1.1@6208.31,1769.15 ; R2.2@6201.46,1633 R1.1@6201.46,1706 ; C1.1@6203.43,1785.68 ccw(c6203.43,1804.31) C1.1@6216.61,1791.14 ; R1.1@6210.46,1697 R1.1@6201.46,1706 ; C1.1@6213.12,1776 cw(c6241.25,1776) 6221.36,1795.89 ; U2.5@6344.51,1825 6250.46,1825 C1.1@6201.46,1776 R1.1@6201.46,1706
NetC2_2: C2.2 U2.3 | length 188.3
  Bottom Layer w20: U2.3@6533.49,1875 6534.49,1874 6628,1874 6658,1904 C2.2@6670.54,1904 ; 6633.99,1879.99 cw(c6668.57,1845.42) C2.2@6668.57,1894.32
NetC7_1: C7.1 C9.2 L1.1 Relay.3 U2.1 U2.6 U2.7 U2.8 | length 2830.2
  Bottom Layer w20: L1.1@5518,2106.12 5600.88,2106.12 5828,1879 6340.51,1879 U2.6@6344.51,1875 ; L1.1@5552,2105.12 L1.1@5592.12,2065 ; L1.1@5555.4,2047.22 cw(c5555.4,1795.23) 5733.59,1973.41 ; L1.1@5555.4,2067.22 cw(c5555.4,1863.51) 5699.44,2007.56 ; L1.1@5555.4,2087.22 cw(c5555.4,1931.8) 5665.3,2041.7 ; L1.1@5555.4,2107.22 cw(c5555.4,2000.08) 5631.16,2075.84 ; L1.1@5614.3,2106.12 ccw(c5646.69,2106.12) L1.1@5623.79,2083.21 ; 6296.2,1879 cw(c6296.2,1856.22) U2.6@6312.31,1872.33 ; U2.8@6344.51,1975 6461,1975 ; Relay.3@6450.77,2199.78 cw(c6426.07,2175.08) 6461,2175.08 ; 6461,2177.97 cw(c6491.84,2177.97) Relay.3@6470.03,2199.78 ; Relay.3@6461,2235.28 6461,1975 ; 6642.77,1975 cw(c6642.77,1948.2) C9.2@6661.72,1967.15 ; 6647.6,1975 ccw(c6647.6,1994.97) C9.2@6661.72,1980.85 ; C9.2@6667.1,1982.04 ccw(c6658.38,1995) 6674,1995 ; 6674,1993.77 ccw(c6692.27,1993.77) C9.2@6679.35,1980.85 ; C9.2@6682.19,1974 cw(c6752.66,1974) 6702.83,2023.83 ; 6933.34,2035 ccw(c6933.34,2120.5) C7.1@6993.8,2060.04 ; C7.1@7009,2014.33 7009,2040 7004,2035 6714,2035 6674,1995 ; 6461,1975 U2.1@6533.49,1975 6664,1975 6674,1965 6674,1995
NetC11_2: C11.2 R26.2 U6.5 X1.1 | length 1121.4
  Bottom Layer w10: U6.5@1792.9,1866.5 1792.9,1718.94 ; 1807.83,1704 ccw(c1849.21,1745.38) X1.1@1855.01,1687.15 ; R26.2@1817.46,1521 1856.83,1560.37 X1.1@1856.83,1655 1792.9,1718.94 ; X1.1@1817.99,1693.85 cw(c1792.92,1668.78) X1.1@1828.37,1668.78 ; R26.2@1819.43,1535.68 ccw(c1819.43,1566.39) 1841.14,1544.68 ; X1.1@1822.76,1689.07 ccw(c1851.91,1718.23) X1.1@1856,1677.2 ; R26.2@1834.12,1521 cw(c1874.32,1521) 1845.89,1549.43 ; X1.1@1836.71,1621.09 cw(c1788.12,1572.5) 1856.83,1572.5 cw(c1925.55,1572.5) 1876.96,1621.09 cw(c1932.26,1565.79) C11.2@1932.26,1644 ; X1.1@1843.78,1628.16 cw(c1812.26,1596.64) 1856.83,1596.64 cw(c1901.41,1596.64) 1869.89,1628.16 cw(c1908.12,1589.93) 1908.12,1644 ; X1.1@1854.01,1697.1 cw(c1846.5,1772.54) 1792.9,1718.93 ; X1.1@1867.83,1644 C11.2@1950.54,1644 ; X1.1@1869.89,1654.28 ccw(c1894.7,1679.09) X1.1@1894.7,1644 ; X1.1@1876.96,1661.35 ccw(c1918.84,1703.23) 1918.84,1644 ; C11.2@1938.18,1633.62 ccw(c1913.11,1608.55) 1913.11,1644 ccw(c1913.11,1679.45) C11.2@1938.18,1654.38
NetC12_2: C12.2 R26.1 U6.6 X1.2 | length 1093.9
  Bottom Layer w10: C12.2@1617.46,1646 X1.2@1702.17,1646 ; C12.2@1629.82,1635.62 cw(c1654.89,1610.55) 1654.89,1646 cw(c1654.89,1681.45) C12.2@1629.82,1656.38 ; C12.2@1630.91,1646 cw(c1630.91,1560.96) 1691.04,1621.09 cw(c1642.45,1572.5) 1711.17,1572.5 cw(c1779.88,1572.5) X1.2@1731.29,1621.09 ; 1653.99,1646 ccw(c1653.99,1698.4) X1.2@1691.04,1661.35 ; 1655.05,1646 cw(c1655.05,1585.1) 1698.11,1628.16 cw(c1666.59,1596.64) 1711.17,1596.64 cw(c1755.74,1596.64) X1.2@1724.22,1628.16 ; X1.2@1712.23,1677.18 ccw(c1717.06,1715.46) X1.2@1744.34,1688.17 ; X1.2@1713.48,1687.1 ccw(c1720.29,1741.09) 1758.78,1702.61 ; X1.2@1714.73,1697.02 ccw(c1723.53,1766.73) 1773.21,1717.04 ; 1722.11,1549.43 cw(c1693.68,1521) R26.1@1733.88,1521 ; 1726.86,1544.68 ccw(c1748.57,1566.39) R26.1@1748.57,1535.68 ; X1.2@1739.63,1668.78 cw(c1775.08,1668.78) X1.2@1750.01,1693.85 ; R26.1@1750.54,1521 1711.17,1560.37 X1.2@1711.17,1655 1773.21,1717.05 ; U6.6@1773.21,1866.5 1773.21,1717.05
NetD1_1: D1.1 L1.2 Q3.2 | length 5882.8
  Bottom Layer w20: 5377.73,2389.73 ccw(c5271.58,2495.88) L1.2@5421.7,2495.88 ; 5385.66,2397.66 cw(c5480.6,2302.72) L1.2@5480.6,2436.98 ; 5411.87,2423.87 ccw(c5339.87,2495.88) L1.2@5441.7,2495.88 ; L1.2@5419.8,2431.8 cw(c5480.6,2371) L1.2@5480.6,2456.98 ; L1.2@5558.91,2495.88 cw(c5558.91,2058.13) Q3.2@5904.47,2326.87 ; L1.2@5577.58,2463.93 cw(c5618.18,2405.42) 5630.84,2475.5 ; L1.2@5581.31,2466.87 cw(c5628.83,2413.67) 5639.07,2484.27 ; L1.2@5582.91,2468.38 cw(c5649.31,2401.97) 5649.31,2495.88 cw(c5649.31,2589.79) L1.2@5582.91,2523.39 ; L1.2@5587.46,2473.85 cw(c5624.05,2448.69) 5628.67,2492.86 ; L1.2@5588.21,2516.77 ccw(c5648.6,2555.22) 5638.33,2484.37 ; L1.2@5588.4,2516.48 ccw(c5673.17,2569.41) 5655.4,2471.06 ; L1.2@5588.98,2447.49 cw(c5657.11,2349.32) 5678.36,2466.91 ; L1.2@5594.64,2451.95 cw(c5666.11,2371.93) 5681.5,2478.12 cw(c5697.15,2586.13) L1.2@5605.08,2527.51 ; L1.2@5597.05,2454.24 cw(c5697.59,2353.69) 5697.59,2495.88 cw(c5697.59,2638.07) L1.2@5597.05,2537.53 ; D1.1@5599.31,1884 ccw(c5514.14,1884) 5574.36,1944.22 ccw(c5634.58,2004.44) D1.1@5634.58,1919.28 ; L1.2@5599.8,2495.88 cw(c5599.8,2089.93) Q3.2@5920.25,2339.14 ; L1.2@5603.94,2462.52 cw(c5655.6,2427.01) 5662.13,2489.36 cw(c5669.76,2562.33) L1.2@5606.33,2525.47 ; D1.1@5634.58,1884 5532.58,1986 5392,1986 5340,2038 5340,2352 5483.88,2495.88 L1.2@5518,2495.88 ; 5640.69,2495.88 cw(c5640.69,2121.73) Q3.2@5936.04,2351.42 ; 5681.58,2495.88 cw(c5681.58,2153.53) Q3.2@5951.83,2363.7 ; 5722.47,2495.88 cw(c5722.47,2185.33) Q3.2@5967.62,2375.98 ; 5763.36,2495.88 cw(c5763.36,2217.13) Q3.2@5983.4,2388.25 ; 5804.25,2495.88 cw(c5804.25,2248.93) Q3.2@5999.19,2400.53 ; 5845.14,2495.88 cw(c5845.14,2280.73) Q3.2@6014.98,2412.81 ; Q3.2@5888.68,2314.59 ccw(c5518.02,2026.33) L1.2@5518,2495.88 ; Q3.2@6042,2395.29 5941.41,2495.88 L1.2@5518,2495.88
NetD2_2: D2.2 R14.1 U4.40 | length 296.3
  Bottom Layer w20: U4.40@4470.22,2311.02 4470.22,2371.22 4502.9,2403.9 4502.9,2425 4503.9,2426 R14.1@4575.54,2426 ; 4474.33,2375.33 ccw(c4438.44,2411.22) D2.2@4489.2,2411.22 ; D2.2@4504.05,2418.85 cw(c4521.32,2401.58) 4521.32,2426 ; R14.1@4566.72,2419.15 ccw(c4550.19,2402.62) 4550.19,2426 ccw(c4550.19,2449.38) R14.1@4566.72,2432.85